# Altium PCB Flight_Controller2.PcbDoc
Units mil, origin at the board's own origin, x right, y up, seen from the top; angles counter-clockwise.
Board outline 1299.21 x 1791.34 mil, 2 copper layers (Top Layer, Bottom Layer), stack 62.8 mil thick; 67 components, 59 nets, 277 pads, 121 vias.
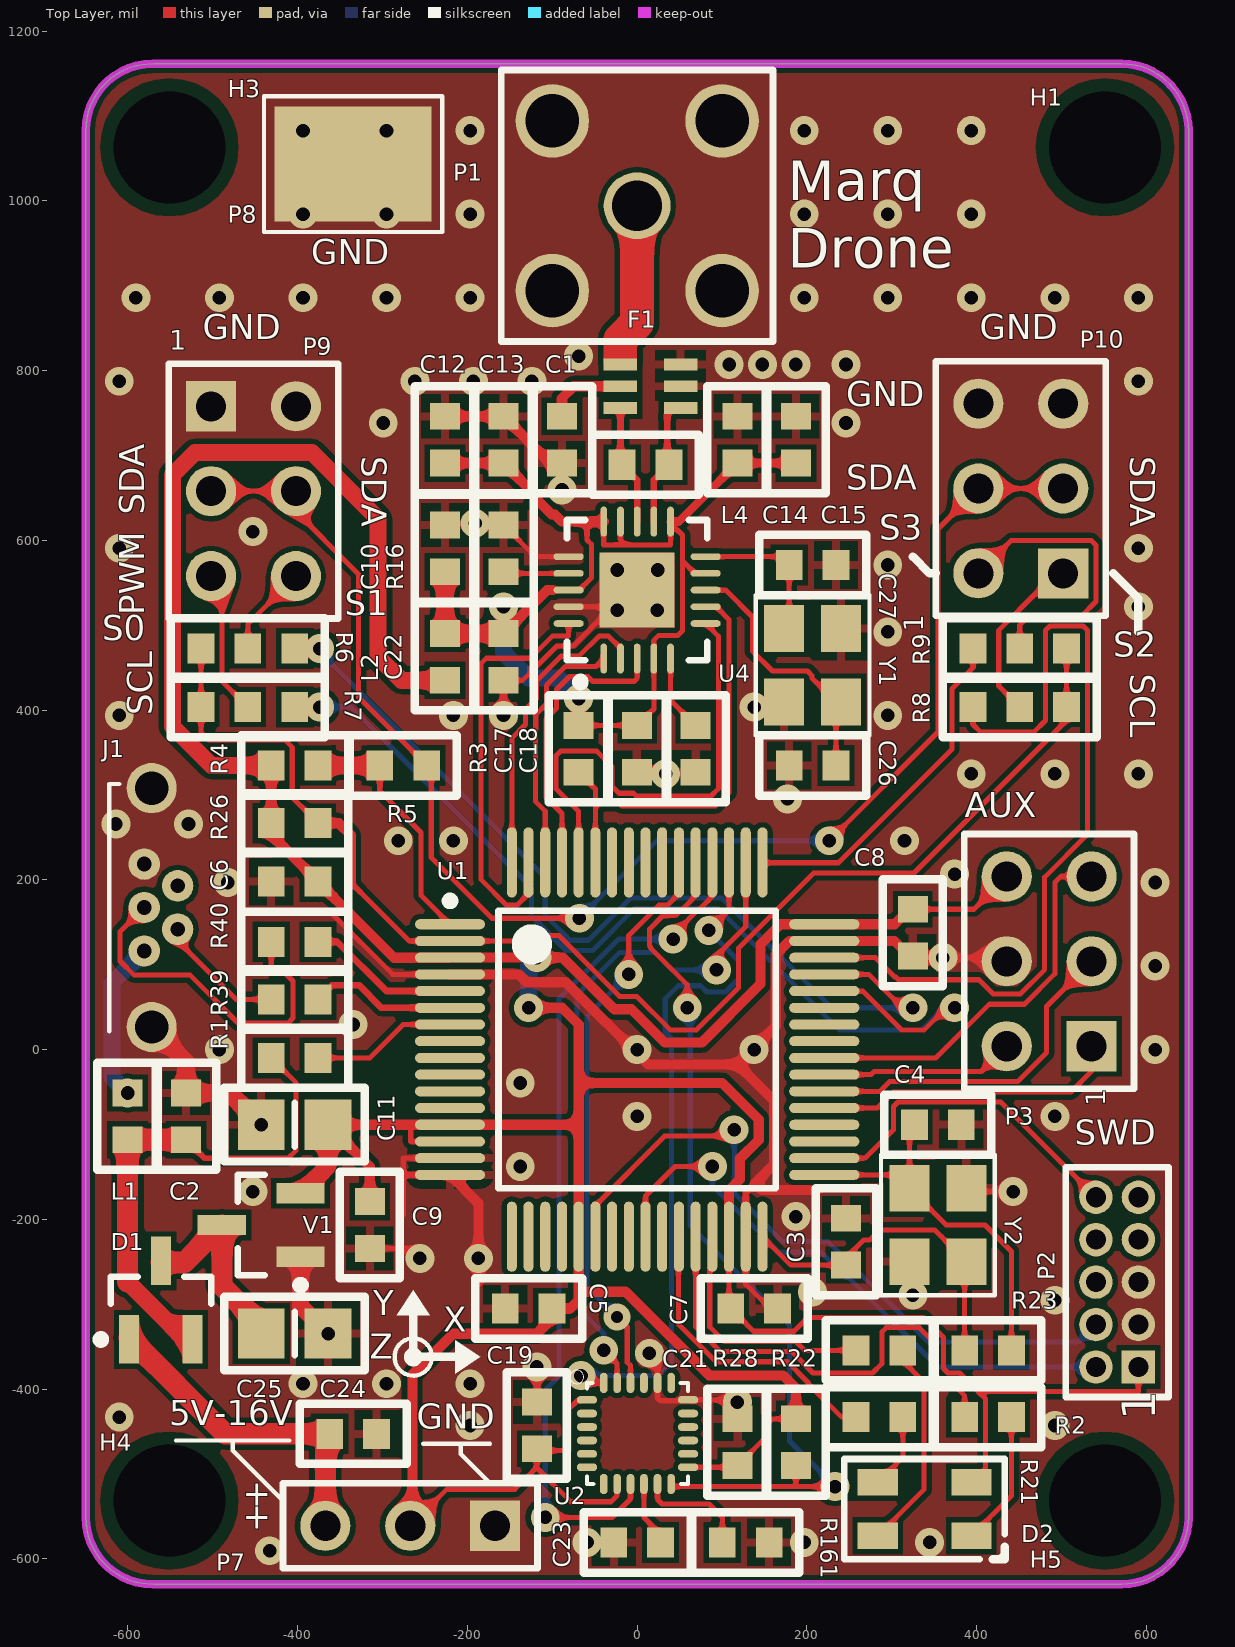
[diagram p0: Top Layer view]
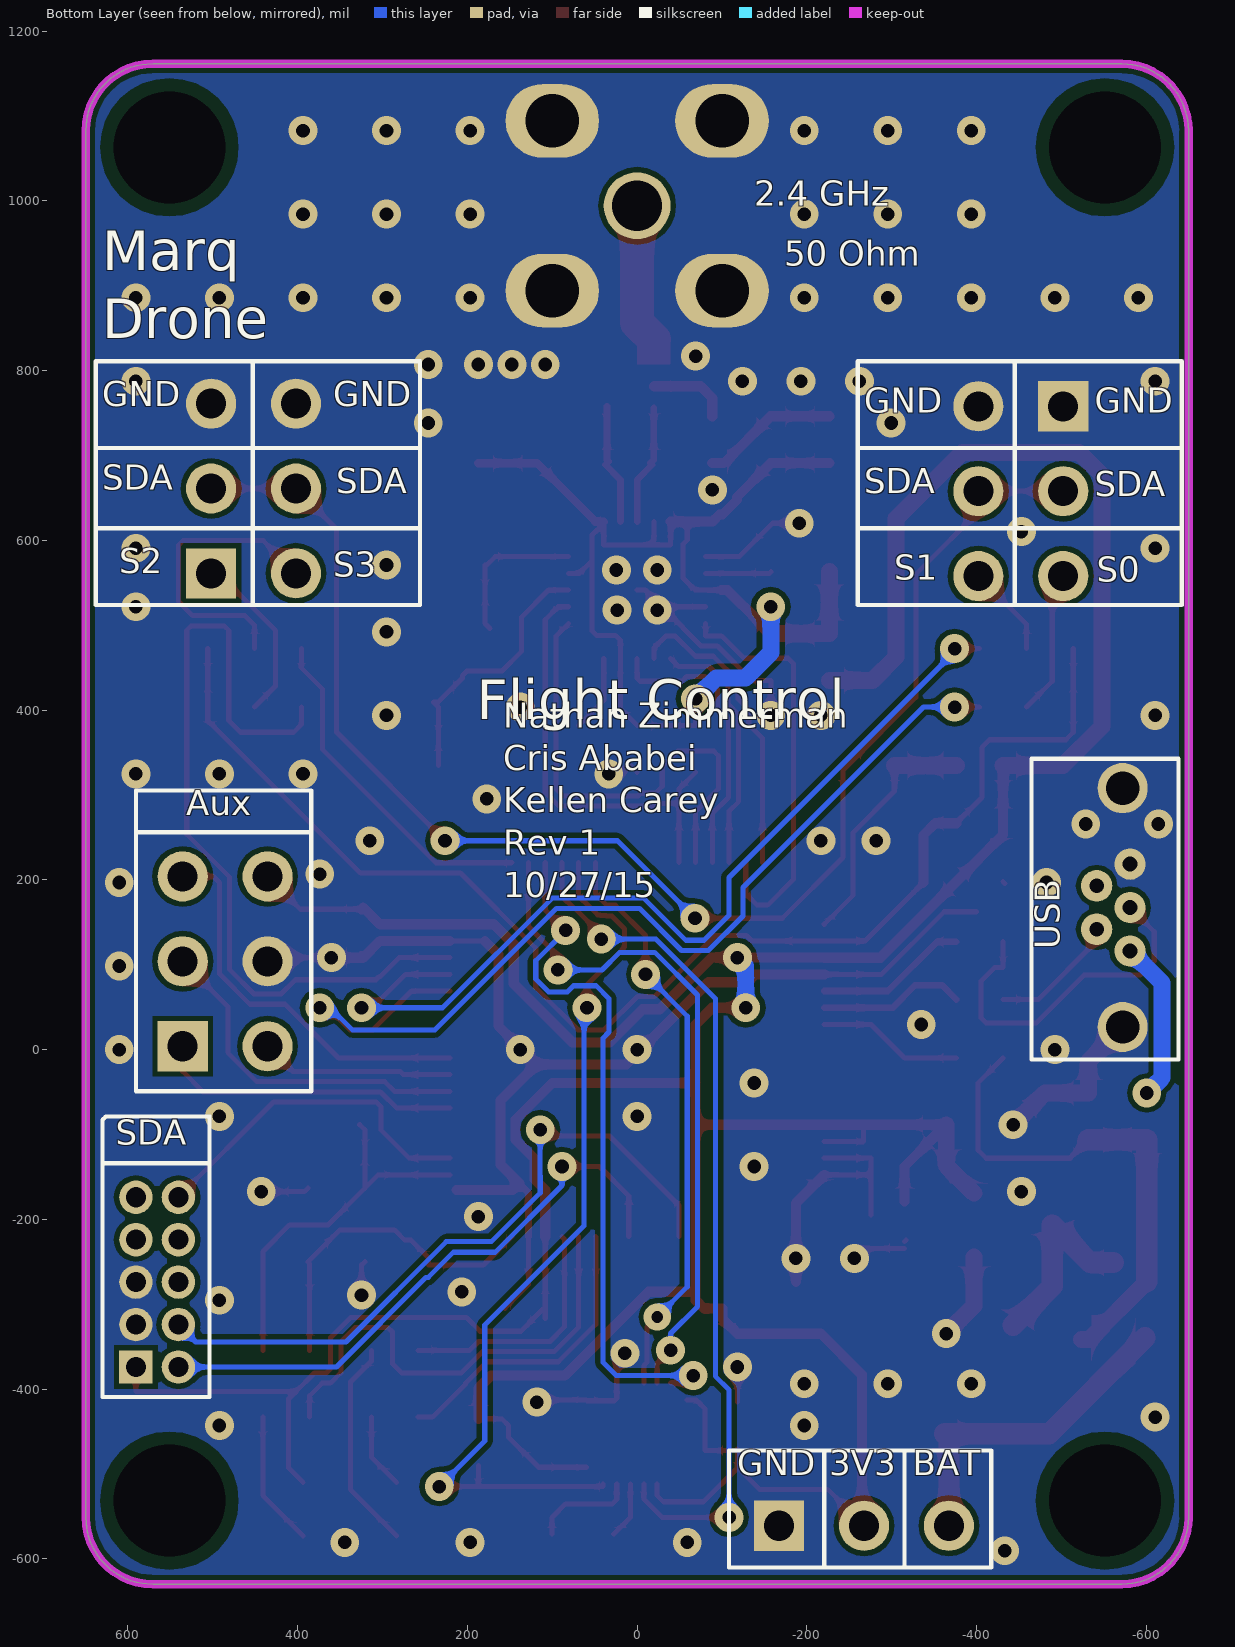
[diagram p1: Bottom Layer view, seen from below]

## Layer stack, top to bottom
Top Solder: solder mask 0.4, Solder Resist, Dk 3.5
Top Layer: signal copper 1.4
Dielectric 1: core 60, FR-4, Dk 4.2
Bottom Layer: signal copper 1.4
Bottom Solder: solder mask 0.4, Solder Resist, Dk 3.5

## Board outline
-649.61,-551.18 -649.61,1082.68 cw(c-570.87,1082.68) -570.87,1161.42 570.87,1161.42 cw(c570.87,1082.68) 649.61,1082.68 649.61,-551.18 cw(c570.87,-551.18) 570.87,-629.92 -570.87,-629.92 cw(c-570.87,-551.18)

## Design rules (kind name [scope] priority, off if disabled: settings)
AssemblyTestPointUsage [All] p1 off:
AssemblyTestpoint [All] p1 off: testpointundercomponent=TRUE minsize=40 maxsize=100 preferedsize=60 minholesize=0 maxholesize=40 preferedholesize=32 testpointgrid=1 usegrid=TRUE gridtolerance=0.01 allowsidetop=TRUE allowsidebottom=TRUE
Clearance Clearance_1 [InComponent('J13') OR InComponent('J16') OR InComponent('J7')] p1: gap=15
Clearance Clearance_3 [InComponent('H1') OR InComponent('H3') OR InComponent('H4') OR InComponent('H5') OR InComponent('H6') OR InComponent('H7') OR InComponent('H8') OR InComponent('H9')] p2: gap=15
Clearance Clearance_2 [(OnLayer('Test Planea')OR OnLayer('Test Plane'))] p3: gap=8.5
Clearance [All] p4: gap=6
ComponentClearance [All] p1 off: gap=10 collisioncheckmode=3 verticalgap=10 showdistances=FALSE
DiffPairsRouting [All] p1: maxlimit=200 minlimit=10 mostfreqgap=10 toplayer_minwidth=6 toplayer_maxwidth=15 toplayer_prefwidth=15 bottomlayer_minwidth=6 bottomlayer_maxwidth=15 bottomlayer_prefwidth=15 maxuncoupledlength=1000
FabricationTestPointUsage [All] p1 off: valid=0 allowmultiple=FALSE
FabricationTestpoint [All] p1 off: side=3 testpointundercomponent=TRUE minsize=40 maxsize=100 preferedsize=60 minholesize=0 maxholesize=40 preferedholesize=32 testpointgrid=1 allowsidetop=TRUE allowsidebottom=TRUE usegrid=TRUE gridtolerance=0.01
HoleSize [All] p1: absolutevalues=TRUE maxlimit=250 minlimit=1 maxpercent=80.000 minpercent=20.000
HoleToHoleClearance [All] p1: gap=12 allowstackedmicrovias=FALSE
MinimumSolderMaskSliver [All] p1: minsoldermaskwidth=6
PasteMaskExpansion [All] p1: expansion=-2
PlaneConnect [All] p1: planeconnectstyle=Direct reliefexpansion=20 reliefentries=4 reliefconductorwidth=20 reliefairgap=10
PolygonConnect PolygonConnect_1 [(HasFootprint('6-0805_MC') OR HasFootprint('1608[0603]C') OR HasFootprint('1608[0603]L') OR HasFootprint('1608[0603]R') OR HasFootprint('1608[0603]LED')OR HasFootprint('Balun')OR HasFootprint('3225_Crystal')OR HasFootprint('LQFP64_10mm_0.5mm'))] p1: connectstyle=Relief reliefconductorwidth=10 reliefentries=4 polygonreliefangle="90 Angle" airgapwidth=10
PolygonConnect [All] p2: connectstyle=Direct reliefconductorwidth=10 reliefentries=4 polygonreliefangle="90 Angle" airgapwidth=10
RoutingVias [All] p1: holewidth=14 width=32 viastyle="Through Hole" minholewidth=14 minwidth=32 maxholewidth=16 maxwidth=34
SMDEntry [All] p1: side=TRUE corner=FALSE anyangle=TRUE
SilkToSilkClearance SilkToSilkClearance_1 [All] p1: silktosilkclearance=0.1
SilkToSolderMaskClearance SilkscreenOverComponentPads [IsPad] p1: minsilkscreentomaskgap=1 clearancetoexposedcopper=TRUE
SolderMaskExpansion SolderMaskExpansion_1 [InComponent('U2')OR InComponent('U27')OR InComponent('J14')] p1: expansion=0
SolderMaskExpansion [All] p2: expansion=5
Width Width_3 [InNet('GND')] p1: maxlimit=80 minlimit=6 preferedwidth=8 minimp=50.000000 maximp=50.000000 favimp=50.000000
Width Width_2 [InNet('3.3V')] p2: maxlimit=40 minlimit=6 preferedwidth=12
Width Width_1 [InNet('5V')] p3: maxlimit=40 minlimit=6 preferedwidth=12
Width [All] p4: maxlimit=80 minlimit=6 preferedwidth=8 minimp=50.000000 maximp=50.000000 favimp=50.000000
17 further rules are at their usual default settings.

## Classes and differential pairs
component class Flight_Controller2: A1 C1 C10 C11 C12 C13 C14 C15 C17 C18 C19 C21 C22 C23 C24 C25 C26 C27 D1 D2 F1 H1 H3 H4 H5 L2 L4 P1 P7 P8 P9 P10 R3 R6 R7 R8 R9 R16 R21 R22 R23 R28 R161 U2 U4 V1 Y1
component class Flight_Controller3: C2 C3 C4 C5 C6 C7 C8 C9 J1 L1 P2 P3 R1 R2 R4 R5 R26 R39 R40 U1 Y2
differential pair USB_MCU1: +USB_MCU1_P -USB_MCU1_N
differential pair USB_MCU: +USB_MCU_P -USB_MCU_N
differential pair RF: +RF_P -RF_N

## Components (designator, comment, footprint, x,y, rotation, side; value= is the part's Value field where it differs from the comment)
C1 "GRM1885C1H220FA01D" 1608[0603]C -88.58,718.5 r270 top
C2 "CL10B104MB8NNNC" 1608[0603]C -531.5,-78.74 r270 top
C3 "CL05C180JB5NNNC" 1608[0603]C 246.06,-226.38 r270 top
C4 "CL05C180JB5NNNC" 1608[0603]C 354.33,-88.58 r180 top
C5 "CL10B104MB8NNNC" 1608[0603]C -127.95,-305.12 r0 top
C6 "CL10B104MB8NNNC" 1608[0603]C -403.54,197.83 r0 top
C7 "CL10B104MB8NNNC" 1608[0603]C 137.8,-305.12 r180 top
C8 "CL10B104MB8NNNC" 1608[0603]C 324.8,137.8 r90 top
C9 "CL10B104MB8NNNC" 1608[0603]C -314.96,-206.69 r90 top
C10 "CL10B104MB8NNNC" 1608[0603]C -226.38,590.55 r270 top
C11 "GRM21BC81C106KE15L" 6-0805_MC -403.54,-88.58 r0 top
C12 "CL10B104MB8NNNC" 1608[0603]C -226.38,718.5 r270 top
C13 "CL10B104MB8NNNC" 1608[0603]C -157.48,718.5 r270 top
C14 "CL10B104MB8NNNC" 1608[0603]C 118.11,718.5 r270 top
C15 "CL10B104MB8NNNC" 1608[0603]C 187.01,718.5 r270 top
C17 "CL10B104MB8NNNC" 1608[0603]C 0,354.33 r90 top
C18 "CL10B104MB8NNNC" 1608[0603]C 68.9,354.33 r90 top
C19 "CL10B103KB8SFNC" 1608[0603]C -118.11,-442.91 r270 top
C21 "CL10B104MB8NNNC" 1608[0603]C 118.11,-462.6 r90 top
C22 "CL10B104MB8NNNC" 1608[0603]C -157.48,462.6 r90 top
C23 "CL10B104MB8NNNC" 1608[0603]C 0,-580.71 r0 top
C24 "CL10B104MB8NNNC" 1608[0603]C -334.65,-452.76 r180 top
C25 "GRM21BC81C106KE15L" 6-0805_MC -403.54,-334.65 r180 top
C26 "CL05C180JB5NNNC" 1608[0603]C 206.69,334.65 r0 top
C27 "CL05C180JB5NNNC" 1608[0603]C 206.69,570.87 r180 top
D1 "BAT54C-7-F" SOT-23B_M_3D -561.02,-295.28 r90 top
D2 "CLV1A-FKB" CLV1A-FKB_RGB_3D 393.7,-561.02 r180 top
F1 "2450BM15B0003E" Balun -19.68,807.09 r90 top
H1 "R30-3001102" M3_Standoff_3 551.18,1062.99 r0 top
H3 "R30-3001102" M3_Standoff_3 -551.18,1062.99 r0 top
H4 "R30-3001102" M3_Standoff_3 -551.18,-531.5 r0 top
H5 "R30-3001102" M3_Standoff_3 551.18,-531.5 r0 top
J1 "614105150721" USB_Micro_Vertical -580.71,167.32 r90 top
L1 "CIM10U800NC" 1608[0603]L -600.39,-78.74 r90 top
L2 "CIM10U800NC" 1608[0603]L -226.38,462.6 r90 top
L4 "LQW18AN10NJ00D" 1608[0603]L 9.84,688.98 r0 top
P1 "SMB" SMA1 0,994.09 r0 top
P2 "GRPB052VWVN-RC" MHDR2X5 590.55,-374.02 r90 top
P3 "68021-406HLF" HDR2X3_3D2 535.43,3.94 r90 top
P7 "M20-9960345" HDR1X3 -167.32,-561.02 r180 top
P8 "5016KCT-ND" GND_CLIP3 -334.65,1043.31 r180 top
P9 "68021-406HLF" HDR2X3_3D2 -501.97,757.87 r270 top
P10 "68021-406HLF" HDR2X3_3D2 501.97,561.02 r90 top
R1 "MCR03EZPFX1003" 1608[0603]R -403.54,-9.84 r0 top
R2 "MCR03ERTF1004" 1608[0603]R 413.39,-354.33 r180 top
R3 "MCR03EZPFX1002" 1608[0603]R -68.9,354.33 r90 top
R4 "MCR03EZPFX1002" 1608[0603]R -403.54,334.65 r180 top
R5 "MCR03EZPFX1003" 1608[0603]R -275.59,334.65 r0 top
R6 "CIM10U800NC" 1608[0603]TRI -431.1,472.44 r180 top
R7 "CIM10U800NC" 1608[0603]TRI -431.1,403.54 r180 top
R8 "CIM10U800NC" 1608[0603]TRI 423.23,403.54 r0 top
R9 "CIM10U800NC" 1608[0603]TRI 423.23,472.44 r0 top
R16 "MCR01MRTF5602" 1608[0603]R -157.48,590.55 r270 top
R21 "MCR03EZPJ271" 1608[0603]R 413.39,-433.07 r180 top
R22 "MCR03EZPJ271" 1608[0603]R 285.43,-354.33 r180 top
R23 "MCR03EZPJ271" 1608[0603]R 285.43,-433.07 r180 top
R26 "MCR03EZPFX1002" 1608[0603]R -403.54,266.73 r180 top
R28 "MCR03EZPFX1002" 1608[0603]R 187.01,-462.6 r90 top
R39 "MCR03ERTF33R0" 1608[0603]R -403.54,59.06 r180 top
R40 "MCR03ERTF33R0" 1608[0603]R -403.54,126.97 r180 top
R161 "MCR03EZPJ000" 1608[0603]R 127.95,-580.71 r0 top
U1 "MK22FN128VLH10" LQFP64_10mm_0.5mm 0,0 r0 top
U2 "MPU-9250" QFN-24/3MM 0,-452.76 r0 top
U4 "CC2500_2_4_ghz" QFN50P400X400-20VM 0,541.34 r90 top
V1 "MCP1702T-5002E/CB" SOT-23B_M_3D -442.91,-206.69 r180 top
Y1 "7M-26.000MEEQ-T" 3225_Crystal 206.69,452.76 r90 top
Y2 "CX3225GB12000P0HPQCC" 3225_Crystal 354.33,-206.7 r90 top

## Footprints (in the part's own frame and the unit in brackets; to place one, negate y for a bottom-side part, rotate by r counter-clockwise, add the part's x,y. Pads: shape width x height; smd on the part's side, far side on the other; paste and mask are expansions set on the pad)
6-0805_MC [mm] "Chip Resistor, Body 2.0x1.2mm, IPC Low Density"
  rect 1.4x1.5 smd: 1(-1,0) 2(1,0)
  silkscreen extent -2.1,-1.1 2.1,1.1, body extent -1,-0.62 1,0.63, height 0.59
1608[0603]C [mm] "Chip Capacitor, Body 1.6x0.8mm, IPC High Density"
  rect 0.8x0.9 smd: 1(-0.7,0) 2(0.7,0)
  silkscreen extent -1.6,-0.9 1.6,0.9, body extent -0.8,-0.4 0.8,0.4, height 0.78
1608[0603]L [mm] "Chip Capacitor, Body 1.6x0.8mm, IPC High Density"
  rect 0.8x0.9 smd: 1(-0.7,0) 2(0.7,0)
  silkscreen extent -1.6,-0.9 1.6,0.9, body extent -0.8,-0.4 0.8,0.4, height 0.8
1608[0603]R [mm] "Chip Capacitor, Body 1.6x0.8mm, IPC High Density"
  rect 0.8x0.9 smd: 1(-0.7,0) 2(0.7,0)
  silkscreen extent -1.6,-0.9 1.6,0.9, body extent -0.8,-0.4 0.8,0.4, height 0.44
1608[0603]TRI [mm] "Chip Capacitor, Body 1.6x0.8mm, IPC High Density"
  rect 0.8x0.9 smd: 1(-0.7,0) 2(0.7,0) 3(2.1,0)
  silkscreen extent -1.6,-0.9 3,0.9, body extent -0.8,-0.4 2.2,0.4, height 0.8
3225_Crystal [mm] "12 MHz Micro Crystal"
  rect 1.4x1.2 smd: 1(-1.1,-0.85) 2(1.1,-0.85) 3(1.1,0.85) 4(-1.1,0.85)
  silkscreen extent -2.1,-1.7 2.1,1.7, body extent -1.6,-1.25 1.6,1.25, height 0.81
Balun [mm]
  rect 0.35x1 smd mask+0.152: 1(0,0) 2(-0.65,0) 3(-1.3,0) 4(-1.3,-1.8) 5(-0.65,-1.8) 6(0,-1.8)
CLV1A-FKB_RGB_3D [mm]
  rect 1.2x0.8 smd: 1(0,0.3) 2(0,-1.3) 3(2.8,-1.3) 4(2.8,0.3)
  silkscreen extent -1,-2 3.8,1, body extent -0.35,-1.91 3.15,0.89, height 1.9
GND_CLIP3 [mil] "Ground clip for a probe"
  rect 185x135 smd: 1(0,0)
  silkscreen extent -105,-80 105,80, body extent -75,-55 75,55, height 91
HDR1X3 [mm] "Connector; Header; 3 Position"
  rect 1.5x1.5 hole 0.9: 1(0,0)
  round 1.5 hole 0.9: 2(2.54,0) 3(5.08,0)
  silkscreen extent -1.27,-1.27 6.35,1.27
HDR2X3_3D2 [mm] "Connector; Header; 3x2 Position"
  rect 1.5x1.5 hole 0.9: 1(0,0)
  round 1.5 hole 0.9: 2(0,2.54) 3(2.54,0) 4(2.54,2.54) 5(5.08,0) 6(5.08,2.54)
  silkscreen extent -1.27,-1.27 6.35,3.81, body extent -1.21,-9.55 6.41,2.9, height 5.8
LQFP64_10mm_0.5mm [mm] "Thin QFP, 64-Leads, Body 10x10mm, Pitch 0.5mm, IPC Low Density"
  oval 2.1x0.3 smd mask+0: 1(-5.6,3.75) 2(-5.6,3.25) 3(-5.6,2.75) 4(-5.6,2.25) 5(-5.6,1.75) 6(-5.6,1.25) 7(-5.6,0.75) 8(-5.6,0.25) 9(-5.6,-0.25) 10(-5.6,-0.75) 11(-5.6,-1.25) 12(-5.6,-1.75) 13(-5.6,-2.25) 14(-5.6,-2.75) 15(-5.6,-3.25) 16(-5.6,-3.75) 33(5.6,-3.75) 34(5.6,-3.25) 35(5.6,-2.75) 36(5.6,-2.25) 37(5.6,-1.75) 38(5.6,-1.25) 39(5.6,-0.75) 40(5.6,-0.25) 41(5.6,0.25) 42(5.6,0.75) 43(5.6,1.25) 44(5.6,1.75) 45(5.6,2.25) 46(5.6,2.75) 47(5.6,3.25) 48(5.6,3.75)
  oval 0.3x2.1 smd mask+0: 17(-3.75,-5.6) 18(-3.25,-5.6) 19(-2.75,-5.6) 20(-2.25,-5.6) 21(-1.75,-5.6) 22(-1.25,-5.6) 23(-0.75,-5.6) 24(-0.25,-5.6) 25(0.25,-5.6) 26(0.75,-5.6) 27(1.25,-5.6) 28(1.75,-5.6) 29(2.25,-5.6) 30(2.75,-5.6) 31(3.25,-5.6) 32(3.75,-5.6) 49(3.75,5.6) 50(3.25,5.6) 51(2.75,5.6) 52(2.25,5.6) 53(1.75,5.6) 54(1.25,5.6) 55(0.75,5.6) 56(0.25,5.6) 57(-0.25,5.6) 58(-0.75,5.6) 59(-1.25,5.6) 60(-1.75,5.6) 61(-2.25,5.6) 62(-2.75,5.6) 63(-3.25,5.6) 64(-3.75,5.6)
  silkscreen extent -5.72,-4.15 4.15,4.57, body extent -6,-6 6,6, height 1.6
M3_Standoff_3 [mil]
  round 0 hole 132 unplated paste+66 mask+66: 1(0,0)
MHDR2X5 [mm] "Connector; Header; 5x2 Position"
  rect 1x1 hole 0.6 mask+0: 1(0,0)
  round 1 hole 0.6 mask+0: 2(0,1.27) 3(1.27,0) 4(1.27,1.27) 5(2.54,0) 6(2.54,1.27) 7(3.81,0) 8(3.81,1.27) 9(5.08,0) 10(5.08,1.27)
  silkscreen extent -0.9,-0.9 5.98,2.17
QFN50P400X400-20VM [mm] "QFN, 20-Leads, Body 4x4mm, Pitch 0.5mm, IPC Low Density"
  oval 0.9x0.2 smd mask+0.051: 1(-2.05,1) 2(-2.05,0.5) 3(-2.05,0) 4(-2.05,-0.5) 5(-2.05,-1) 11(2.05,-1) 12(2.05,-0.5) 13(2.05,0) 14(2.05,0.5) 15(2.05,1)
  oval 0.2x0.9 smd mask+0.051: 6(-1,-2.05) 7(-0.5,-2.05) 8(0,-2.05) 9(0.5,-2.05) 10(1,-2.05) 16(1,2.05) 17(0.5,2.05) 18(0,2.05) 19(-0.5,2.05) 20(-1,2.05)
  rect 2.25x2.25 smd mask+0.051: 21(0,0)
  silkscreen extent -2.87,-2.1 2.1,2.1, body extent -2.07,-2.07 2.07,2.07, height 1
QFN-24/3MM [mil]
  rrect100% 24x9 smd mask+0: 1(-59.06,40) 2(-59.06,24) 3(-59.06,8) 4(-59.06,-7.87) 5(-59.06,-23.62) 6(-59.06,-39.37) 13(60,-39.37) 14(60,-23.62) 15(60,-7.87) 16(60,8) 17(60,24) 18(60,40)
  rrect100% 9x24 smd mask+0: 7(-39.37,-59.06) 8(-23.62,-59.06) 9(-7.87,-59.06) 10(8,-59.06) 11(24,-59.06) 12(40,-59.06) 19(40,60) 20(24,60) 21(8,60) 22(-7.87,60) 23(-23.62,60) 24(-39.37,60)
  silkscreen extent -79,-59 60,75, body extent -59,-59 59,59, height 35
SMA1 [mm]
  round 2 hole 1.5: 1(0,0)
  round 2.2 / inner round 2.2 / far side oval 2.8x2.2 hole 1.6: 2(-2.54,-2.54) 2(-2.54,2.54) 2(2.54,-2.54) 2(2.54,2.54)
  silkscreen extent -4.06,-4.06 4.06,4.06, body extent -3.15,-3.15 3.16,3.16, height 9.55
SOT-23B_M_3D [mm] "SOT23, 3-Leads, Body 2.9x1.3mm, Pitch 0.95mm, Lead Span 2.4mm, IPC Low Density"
  rect 1.45x0.6 smd: 1(-1.175,0.95) 2(-1.175,-0.95) 3(1.175,0)
  silkscreen extent -1.3,-1.5 0.7,1.92, body extent -1.25,-1.46 1.23,1.46, height 0.98
USB_Micro_Vertical [mm] "WR-COM_USB_Micro Type B_Vertical_THT Micro Type B Vertical THT"
  round 0.94 hole 0.44 mask+0: 1(-1.3,0) 2(-0.65,-1) 3(0,0) 4(0.65,-1) 5(1.3,0)
  round 1.5 hole 1 mask+0: Z1(-3.575,-0.22) Z2(3.575,-0.22)
  silkscreen extent -3.7,0.75 3.7,1.05, body extent -3.99,-1.57 4.01,1.33, height 5.62

## Part data
C1 C2 C3 C4 C5 C6 C7 C8 C9 C10 C11 C12 C13 C14 C15 C17 C18 C19 C21 C22 C23 C24 C25 C26 C27: library part "Cap Semi", "Capacitor (Semiconductor SIM Model)"
D1: library part Bat45C, "Bat45C"
D2: library part RGB_LED_SMT, "SMT RGB LED"
F1: library part BALUN_2_4_GHZ, "2450BM15B0003"
H1 H3 H4 H5: library part stand_off, "stand_off"
J1: library part "WR-Communication Connectors 614105150721", "WR-COM_USB_Micro Type B_Vertical_THT"
L1 L2 L4: library part Inductor, "Inductor"
P1: "SMB Straight Connector"
P2: library part "Header 5X2", "Header, 5-Pin, Dual row"
P3 P9 P10: library part "Header 3X2", "Header, 3-Pin, Dual row"
P7: library part "Header 3", "Header, 3-Pin"
P8: library part GND_CLIP, "GND_CLIP"
R1 R2 R3 R4 R5 R16 R21 R22 R23 R26 R28 R39 R40 R161: library part Res1, "Resistor"
R6 R7 R8 R9: library part RPot, "Potentiometer"
U1: "MK22FN128VLH10 MCU"
U2: library part MPU-9250_LIB
V1: library part MCP1700, "MCP1700 3.3V REG"
Y1 Y2: library part 12MHz_Crystal, "12MHz Micro Crystal"

## Via types
v1: diameter 34, hole 16, Top Layer to Bottom Layer, tented both sides, 120 vias
v2: diameter 32, hole 14, Top Layer to Bottom Layer, tented both sides, 1 vias

## Nets (pads, with @x,y where several pads share a name; then routed paths per layer and width w, separated by ;. In a path a pad name is that pad's centre, name@x,y a point inside that pad or via, vN(x,y) a via of type N, cw(c..) or ccw(c..) an arc to the next point about the centre after c; other vN are vias at no path point)
3.3V: C5.2 C6.2 C7.2 C8.2 C9.2 C11.2 C19.2 C21.1 D2.2 L2.1 P2.1 P3.6 P7.2 R4.2 R26.2 R28.2 U1.3 U1.13 U1.14 U1.21 U1.30 U1.48 U2.1 U2.8 U2.13 V1.2 | length 5693.3
  Top Layer w6: P7.2 -264.81,-558.51 -224.43,-518.13 -144.11,-518.13 -118.11,-492.13 ; -266.73,-89.57 -266.73,-108.27 U1.14 ; U2.1 -69.65,-412.76 -80.06,-423.16 -80.06,-472.44 -116.14,-472.44 C19.2 -118.11,-492.13 ; U2.8 -23.62,-525.59 -30.84,-532.81 -78.17,-532.81 -118.11,-492.87 -118.11,-492.13 ; U2.13 116.14,-492.13 C21.1 151.57,-456.69 151.57,-442.91 159.45,-435.04 R28.2 ; C7.2@108.27,-316.93 U1.30 ; C7.2 136.95,-331.83 184.83,-331.83 201.05,-315.61 337.44,-315.61 361.08,-339.25 361.08,-375.78 366.35,-381.05 380,-381.05 401.65,-402.7 ; C8.2 396.85,165.36 P3.6 ; D2.2 410.57,-492.97 410.57,-411.63 401.65,-402.7 ; P2.1 590.55,-402.7 401.65,-402.7
  Top Layer w12: R4.2 R26.2 -431.1,252.95 C6.2 -286.42,108.27 U1.3 -220.38,108.36 v1@-109.95,108.36 ; C9.2 -314.96,-137.8 C11.2 U1.13 -68.9,-88.58 ; P7.2@-264.81,-558.51 -264.81,-383.11 -216.54,-334.83 -118.3,-334.83 -100.39,-316.93 C5.2 -78.74,-305.12 -68.9,-295.28 -68.9,-285.43 ; v1(-127.95,49.21) -88.58,49.21 -68.9,29.53 -68.9,-39.37 ; v1(-118.11,108.27) -110.05,108.27 v1@-109.95,108.36 ; U1.30 108.27,-165.51 120.92,-152.85 120.92,-128.75 143.17,-106.5 143.17,-82.48 100.07,-39.37 -68.9,-39.37 ; R28.2 187.01,-398.99 171.88,-383.86 84.87,-383.86 -13.55,-285.43 -68.9,-285.43 ; C8.2 322.84,167.32 303.15,147.64 U1.48 168.85,147.64 145.38,124.17 145.38,77.56 76.04,8.21 32.8,8.21 -6.57,47.58 -26.83,47.58 -87.6,108.36 v1@-109.95,108.36 ; -68.9,-285.43 U1.21 -68.9,-88.58 ; -68.9,-88.58 -68.9,-39.37
  Top Layer w20: R4.2 -501.52,334.65 -547.5,380.63 -547.5,676.73 -520.83,703.4 -383.11,703.4 -305.12,625.41 -305.12,462.6 -277.56,435.04 L2.1 ; V1.2 -364.17,-136.81 C11.2
  Bottom Layer w20: v1(-127.95,49.21) -127.95,98.43 v1(-118.11,108.27)
3V3CC: C10.2 C12.2 C13.2 C14.2 C15.2 C17.2 C22.2 L2.2 R3.2 U4.4 U4.9 U4.11 U4.14 U4.15 U4.18 | length 1515.7
  Top Layer w6: C22.2 v1(-157.48,521.65) ; -125.99,521.65 -124.02,523.62 -122.05,521.65 ; -99.41,541.34 U4.18 -68.32,541.34 -53.99,555.67 -53.99,595.33 -59.06,600.39 -59.06,622.05 ; v1(-68.9,413.39) R3.2 C17.2 19.69,401.58 U4.4 19.69,482.28 25.45,488.05 48.02,488.05 53.29,493.32 53.29,576.05 ; U4.15 -39.37,594.63 -13.92,594.63 ; U4.14 -19.68,600.39 -13.92,594.63 ; U4.11 U4.11@39.37,620.08 ; U4.9 68.32,561.02 53.29,576.05 ; -13.92,594.63 39.37,594.63 U4.11@39.37,620.08 ; U4.11@39.37,620.08 53.29,606.16 53.29,576.05
  Top Layer w10: U4.11 49.21,622.05 C14.2 C15.2
  Top Layer w12: C12.2 C13.2 -117.58,651.05 -117.58,647.44 -100.59,630.45 -96.99,630.45 -88.58,622.05 -59.06,622.05 U4.15 ; C22.2 -125.99,521.65 ; -124.02,523.62 -106.3,541.34 -99.41,541.34
  Top Layer w20: C10.2 L2.2 C22.2
  Bottom Layer w20: -157.48,472.44 -157.48,467.52 ; v1(-157.48,521.65) -157.48,467.52 ; v1(-68.9,413.39) -93.5,437.99 -127.95,437.99 -157.48,467.52
5V: C2.2 D1.2 L1.1 R1.1 | length 604.8
  Top Layer w6: C2.2 -509.69,-128.11 -411.21,-128.11 -401.73,-118.63 -401.73,-39.21 R1.1
  Top Layer w20: -600.39,-273.62 -532.48,-341.54 D1.2
  Top Layer w25: -600.39,-273.62 L1.1 C2.2
12MHZ_XIN: C3.2 R2.2 U1.32 Y2.1 | length 397.1
  Top Layer w6: U1.32 181.1,-253.94 C3.2 246.06,-245.08 266.57,-224.57 273.78,-224.57 285.9,-212.44 350.24,-212.44 Y2.1 385.83,-251.97 R2.2
12MHZ_XOUT: C4.2 R2.1 U1.33 Y2.3 | length 451.6
  Top Layer w6: U1.33 305.12,-147.64 Y2.3 ; C4.2 320.87,-94.48 Y2.3 ; R2.1 440.94,-237.83 409.81,-206.69 364.17,-206.69 Y2.3
A1: P3.3 U1.38 | length 410.3
  Top Layer w6: U1.38 286.01,-49.21 297.35,-37.87 448.12,-37.87 482.28,-3.7 482.28,50.79 P3.3
A2: P3.1 U1.37 | length 362.4
  Top Layer w6: U1.37 283.29,-68.9 302.32,-49.87 351.22,-49.87 357.44,-49.87 511.16,-49.87 535.43,-25.59 P3.1
B_LED: R23.2 U1.27 | length 358.6
  Top Layer w6: U1.27 48.64,-221.04 48.64,-323.66 92.82,-367.83 177.07,-367.83 202.01,-392.78 202.01,-393.92 241.16,-433.07 R23.2
G_LED: R22.2 U1.29 | length 291.3
  Top Layer w6: U1.29 85.49,-223.57 85.49,-326.56 102.76,-343.83 187.01,-343.83 197.5,-354.33 R22.2
GDO0: U1.60 U4.6 | length 570.2
  Top Layer w6: U1.60 -68.9,280.58 -95.61,307.3 -95.61,346.25 -90.34,351.52 -47.45,351.52 -29.53,333.59 -29.53,310.11 -21.44,302.02 -4.15,302.02 -0.93,298.8 87.12,298.8 95.61,307.3 95.61,487.06 U4.6
GDO2: U1.61 U4.3 | length 345.2
  Top Layer w6: U1.61 -88.58,278.02 -107.61,297.05 -107.61,372.86 -107.48,372.99 -107.48,389.5 -94.9,402.08 -94.9,424.16 -79.67,439.39 -58.13,439.39 -52.66,433.91 -3.13,433.91 0,437.04 U4.3
GND: C1.2 C2.1 C3.1 C4.1 C5.1 C6.1 C7.1 C8.1 C9.1 C10.1 C11.1 C12.1 C13.1 C14.1 C15.1 C17.1 C18.1 C19.1 C21.2 C22.1 C23.1 C24.1 C25.1 C26.1 C27.1 F1.5 F1.6 J1.5 J1.Z1 J1.Z2 P1.2 P2.3 P2.5 P3.4 P7.1 P8.1 P9.1 P9.2 P10.5 P10.6 R16.1 R161.2 U1.4 U1.15 U1.16 U1.31 U1.47 U2.18 U2.20 U4.16 U4.19 U4.21 V1.1 Y1.2 Y1.4 Y2.2 Y2.4 | length 3048.9
  Top Layer w6: C6.1@-433.07,195.87 C6.1 ; -399.61,162.4 -361.76,162.4 -287.94,88.58 U1.4 ; C9.1@-316.93,-224.41 C9.1@-314.96,-226.38 ; C9.1 -257.87,-234.25 -255.91,-236.22 v1(-255.91,-246.06) ; -275.59,-194.88 -275.59,-147.64 ; U1.16 -275.59,-147.64 ; U1.15 -275.59,-127.95 -275.59,-147.64 ; v1(-190.94,620.08) -159.45,620.08 R16.1 -120.08,580.71 U4.16 ; v1(-157.48,393.7) C22.1 -134.92,435.04 -94.58,475.39 -75.22,475.39 -53.99,496.61 -53.99,497.19 U4.21@-29.53,521.65 ; C19.1 v1(-118.11,-374.02) ; U4.19 U4.21@-29.53,521.65 ; C17.1 7.87,334.65 17.72,324.8 v1(33.46,324.8) ; U4.21 -9.84,541.34 U4.21@-29.53,521.65 ; v1(14.38,-357.76) 24,-367.38 U2.20 24,-411.07 26.69,-413.76 59,-413.76 U2.18 115.51,-412.76 v1(118.11,-415.35) ; U1.31 127.95,-276.64 155.51,-304.2 C7.1@155.51,-305.12 ; U1.47@179.4,127.95 U1.47 ; Y2.4 324.8,-253.94 v1(324.8,-289.37) ; v1(360.24,108.27) 431.1,108.27 P3.4 ; Y2.2 391.73,-167.32 v1(442.91,-167.32)
  Top Layer w8: U1.31 127.95,-168.45 138.92,-157.48
  Top Layer w12: C12.1 C13.1 -102.36,690.94 C1.2 ; U1.16 -187.01,-181.1 v1(-187.01,-246.06) -187.01,-273.62 ; U1.4 -139.44,88.58 -130.12,79.27 -83.97,79.27 12.77,-17.47 118.27,-17.47 ; U1.47@179.4,127.95 163.38,111.94 163.38,27.65 118.27,-17.47 ; 212.79,-165.54 146.98,-165.54 138.92,-157.48 161.17,-135.23 161.17,-60.38 118.27,-17.47 ; U1.47 303.15,127.95 322.83,108.27 C8.1 326.77,108.27 v1(360.24,108.27)
  Top Layer w20: J1.Z1 -531.5,-13.98 C2.1 -480.31,-51.18 v1(-442.91,-88.58) ; V1.1 -396.65,-302.17 v1(-364.17,-334.65)
  other v1: -433.07,-590.55 -59.06,-580.71 196.85,-580.71 344.49,-580.71 -196.85,-442.91 492.13,-442.91 -610.24,-433.07 -393.7,-393.7 -295.28,-393.7 -196.85,-393.7 492.13,-295.28 206.69,-285.43 187.01,-196.85 -452.76,-167.32 -137.8,-137.8 0,-78.74 492.13,-78.74 -137.8,-39.37 -492.13,0 0,0 137.8,0 610.24,0 -334.65,29.53 610.24,98.43 -482.28,196.85 610.24,196.85 374.02,206.69 -281.5,246.06 -216.54,246.06 314.96,246.06 -614.17,265.75 -528.55,265.75 177.17,295.28 393.7,324.8 492.13,324.8 590.55,324.8 -610.24,393.7 -216.54,393.7 295.28,393.7 137.8,403.54 295.28,492.13 -23.62,517.72 23.62,517.72 590.55,521.65 -23.62,564.96 24.38,564.96 295.28,570.87 -610.24,590.55 590.55,590.55 -452.76,610.24 -88.58,659.45 -299.21,738.19 246.06,738.19 -610.24,787.4 -261.81,787.4 -192.91,787.4 -124.02,787.4 590.55,787.4 108.27,807.09 147.64,807.09 187.01,807.09 246.06,807.09 -68.9,816.93 -590.55,885.83 -492.13,885.83 -393.7,885.83 -295.28,885.83 -196.85,885.83 196.85,885.83 295.28,885.83 393.7,885.83 492.13,885.83 590.55,885.83 -393.7,984.25 -295.28,984.25 -196.85,984.25 196.85,984.25 295.28,984.25 393.7,984.25 -393.7,1082.68 -295.28,1082.68 -196.85,1082.68 196.85,1082.68 295.28,1082.68 393.7,1082.68
K22F_SWD_CLK: P2.4 U1.22 | length 819.4
  Top Layer w6: U1.22 -49.21,-183.65 32.48,-101.95 106.71,-101.95 v1(114.17,-94.49)
  Bottom Layer w6: v1(114.17,-94.49) 114.17,-116.77 114.58,-117.18 114.58,-148.56 114.17,-148.97 114.17,-168.7 171.85,-226.38 225.04,-226.38 343.15,-344.49 520.08,-344.49 P2.4
MISO1: U1.64 U4.2 | length 365.1
  Top Layer w6: U1.64 -147.64,366.77 -131.48,382.93 -131.48,400.59 -118.9,413.18 -118.9,434.1 -89.61,463.39 -68.69,463.39 -44.73,487.35 -34.01,487.35 -19.68,473.02 U4.2
MISO2: U1.52 U2.9 | length 1023.3
  Top Layer w6: v1(-108.27,-551.18) -29.53,-551.18 -7.87,-529.53 U2.9 ; v1(42.36,130.06) 43.24,130.06 45.35,127.95 45.35,138.21 73.54,166.39 74.51,166.39 88.58,180.47 U1.52
  Bottom Layer w6: v1(-108.27,-551.18) -108.27,-400.94 -92.11,-384.79 -92.11,60.05 -22.11,130.06 v1(42.36,130.06)
MOSI1: U1.63 U4.20 | length 496.9
  Top Layer w6: U1.63 -127.95,183.64 -141.47,170.13 -153.81,170.13 -184.2,200.52 -184.2,454.52 -177.67,461.04 -125.9,461.04 -99.49,487.44 -80.71,487.44 U4.20
MOSI2: U1.51 U2.24 | length 838.7
  Top Layer w6: v1(-66.11,-384.16) -57.51,-392.76 U2.24 ; v1(84.3,140.39) 108.27,164.36 U1.51
  Bottom Layer w6: v1(-66.11,-384.16) 24.75,-384.16 40.38,-368.53 40.38,13.37 33.06,20.69 33.06,59.98 48.29,75.21 74.87,75.21 82.22,67.86 104.21,67.86 119.44,83.09 119.44,104.63 84.3,139.77 v1(84.3,140.39)
MPU_INT: R28.1 U1.53 U2.12 | length 1079.4
  Top Layer w6: U2.12 40,-514.9 183.91,-514.9 ; v1(59.06,49.21) 59.06,76.32 17.7,117.68 17.7,117.95 16.36,119.29 16.36,119.69 15.2,120.85 15.2,122.03 14.71,122.52 14.71,142.03 29.94,157.26 36.22,157.26 36.87,157.91 43.08,157.91 43.88,158.71 46.56,158.71 68.9,181.04 U1.53 ; R28.1 187.01,-511.81 183.91,-514.9 ; v1(233.13,-514.9) 183.91,-514.9
  Bottom Layer w6: v1(59.06,49.21) 62.58,45.69 62.58,-207.62 179.54,-324.58 179.54,-461.32 v1(233.13,-514.9)
NCS1: R3.1 U1.59 U4.7 | length 517.3
  Top Layer w6: R3.1 -49.21,307.09 -49.21,290.02 ; U1.59 -49.21,290.02 ; U4.7 93.1,521.65 108.27,506.48 108.27,302.98 92.09,286.8 -17.78,286.8 -21,290.02 -49.21,290.02
NCS2: U1.54 U2.22 | length 685
  Top Layer w6: v2(-23.62,-314.96) -11.62,-326.96 -11.62,-368.53 -7.87,-372.27 U2.22 ; v1(-9.84,88.58) -9.84,134.45 25.84,170.13 35.7,170.13 49.21,183.64 U1.54
  Bottom Layer w6: v2(-23.62,-314.96) -59.06,-279.53 -59.06,39.37 v1(-9.84,88.58)
NetC1_1: C1.1 F1.2 | length 96.3
  Top Layer w12: C1.1 -88.58,767.72 -74.8,781.5 F1.2
NetC18_2: C18.2 U4.5 | length 91
  Top Layer w6: U4.5 39.37,411.42 C18.2
NetC23_2: C23.2 U2.10 | length 67.2
  Top Layer w6: U2.10 8,-551.31 C23.2@27.56,-570.87
NetC26_2: C26.2 U4.8 Y1.1 | length 316.6
  Top Layer w6: U4.8 104.3,541.34 136.04,509.6 136.04,469.35 159.37,446.01 200.58,446.01 205.85,440.74 205.85,437.85 234.25,409.45 Y1.1 234.25,403.54 C26.2
NetC27_2: C27.2 U4.10 Y1.3 | length 179.8
  Top Layer w6: U4.10 167.32,580.71 177.17,570.87 C27.2 179.13,501.97 Y1.3
NetD2_1: D2.1 R21.1 | length 159.3
  Top Layer w6: D2.1 440.94,-525.59 R21.1
NetD2_3: D2.3 R23.1 | length 89
  Top Layer w6: D2.3 312.99,-480.31 R23.1
NetD2_4: D2.4 R22.1 | length 251.2
  Top Layer w6: D2.4 337.74,-518.56 337.74,-391.65 312.99,-366.9 R22.1
NetF1_1: F1.1 P1.1 | length 165.6
  Top Layer w40: -19.68,836.61 0,856.3 P1.1
NetJ1_1: J1.1 L1.2 | length 198.4
  Top Layer w20: L1.2@-600.39,-47.26 v1(-600.4,-51.17) L1.2@-600.4,-47.25
  Bottom Layer w20: v1(-600.4,-51.17) -618.57,-33 -618.57,78.28 J1.1
NetP9_5: P9.5 R7.2 | length 172.3
  Top Layer w6: P9.5 -489.03,544.94 -489.03,433.91 R7.2
NetP9_6: P9.6 R6.2 | length 108.9
  Top Layer w6: R6.2 -458.66,501.18 P9.6
NetP10_1: P10.1 R8.2 | length 196.2
  Top Layer w6: R8.2 426.04,428.29 426.04,493.89 473.49,541.34 P10.1@501.97,541.34
NetP10_2: P10.2 R9.2 | length 352
  Top Layer w6: P10.2 440.5,599.55 535.22,599.55 540.5,594.28 540.5,527.77 523.89,511.16 461.94,511.16 450.79,500 R9.2
NetR16_2: R16.2 U4.17 | length 77.6
  Top Layer w6: R16.2 -155.51,561.02 U4.17
NetR161_1: R161.1 U2.11 | length 123.1
  Top Layer w6: U2.11 24,-530.12 29.31,-535.43 84.65,-535.43 100.39,-551.18 R161.1@100.39,-570.87
PWM_CH0: R7.1 U1.44 | length 1189.8
  Top Layer w6: R7.1 v1(-374.02,403.54) ; U1.44 265.75,68.9 311.43,23.21 338.17,23.21 364.17,49.21 v1(374.02,49.21)
  Bottom Layer w6: v1(-374.02,403.54) -337.25,403.54 -124.61,190.9 -124.61,157.48 -83.87,116.74 -52.39,116.74 -2.74,166.39 95.07,166.39 238.26,23.21 335.57,23.21 361.57,49.21 v1(374.02,49.21)
PWM_CH1: R6.1 U1.45 | length 1093.9
  Top Layer w6: R6.1 v1(-374.02,472.44) ; U1.45 272.88,88.58 312.25,49.21 v1(324.8,49.21)
  Bottom Layer w6: v1(-374.02,472.44) -374.02,468.5 -108.28,202.77 -108.28,158.12 -78.9,128.74 -57.36,128.74 -7.71,178.39 100.04,178.39 229.23,49.21 v1(324.8,49.21)
PWM_CH2: R8.1 U1.46 | length 985.7
  Top Layer w6: U1.46 280.58,108.27 298.09,90.76 303.36,85.49 304.68,85.49 307.91,82.27 402.62,82.27 419.47,65.41 451.39,65.41 480.13,94.14 480.13,203.12 530.65,253.64 530.65,493.89 525.38,499.16 486.43,499.16 481.16,493.89 481.16,387.72 467.26,373.83 404.72,373.83 395.67,382.87 R8.1
PWM_CH3: R9.1 U1.49 | length 407.7
  Top Layer w6: U1.49 148.04,220.06 237.15,220.06 370.92,353.84 370.92,424.99 395.67,449.74 R9.1
R_LED: R21.2 U1.28 | length 569.7
  Top Layer w6: U1.28 68.9,-326.94 97.79,-355.83 182.04,-355.83 207.25,-381.05 277.35,-381.05 288.24,-370.15 288.24,-332.89 293.52,-327.61 332.47,-327.61 349.08,-344.22 349.08,-380.75 361.38,-393.05 371.08,-393.05 385.83,-407.8 R21.2
RF_N: F1.3 L4.1 U4.13 | length 140.9
  Top Layer w7.99: F1.3 -19.68,694.88 L4.1@-15.75,690.94 ; L4.1 0,671.26 U4.13
RF_P: F1.4 L4.2 U4.12 | length 140
  Top Layer w7.99: U4.12 19.69,671.26 L4.2 ; L4.2@33.47,692.91 35.43,694.88 F1.4@35.43,757.87
RST_TGTMCU: P2.10 U1.34 | length 409.9
  Top Layer w6: U1.34 268.5,-127.95 302.02,-94.43 302.02,-67.14 307.29,-61.87 346.25,-61.87 362.41,-61.87 428.4,-61.87 P2.10
RX1: P3.2 U1.39 | length 228.8
  Top Layer w6: U1.39 275.59,-29.53 279.25,-25.87 405.63,-25.87 P3.2
SCL: R6.3 R7.3 R8.3 R9.3 R26.1 U1.2 | length 1599.1
  Top Layer w6: R6.3 R7.3 -513.78,373.78 -505,365 -415.26,365 -406.35,356.09 -406.35,297.1 R26.1 ; -337.4,196.85 -268.5,127.95 U1.2 -135.2,127.95 -128.88,134.27 -92.3,134.27 -20.61,62.58 -0.36,62.58 39.01,23.21 69.82,23.21 119.44,72.83 119.44,119.44 208.06,208.06 326.17,208.06 505.91,387.8 R8.3 R9.3
  Top Layer w12: R26.1 -351.38,266.73 -337.4,252.75 -337.4,196.85
SCLK1: U1.62 U4.1 | length 299.2
  Top Layer w6: U1.62 -108.27,280.74 -119.61,292.08 -119.61,377.83 -119.48,377.96 -119.48,394.47 -106.9,407.05 -106.9,429.13 -84.64,451.39 -48.61,451.39 U4.1
SCLK2: U1.50 U2.23 | length 811.4
  Top Layer w6: v1(-39.37,-354.33) -23.62,-370.08 U2.23 ; v1(93.44,93.86) 93.44,110.41 127.95,144.92 U1.50
  Bottom Layer w6: v1(-39.37,-354.33) -39.37,-334.57 -71.06,-302.88 -71.06,64.14 -20.61,114.58 20.61,114.58 41.34,93.86 v1(93.44,93.86)
SDA: P9.3 P9.4 P10.3 P10.4 R5.2 | length 1741.6
  Top Layer w6: P9.3 P9.4 -392.13,657.87 -409.11,640.89 -328.33,560.11 -328.33,414.95 R5.2 -242.54,329.15 -242.54,226.21 -171.07,154.74 v1(-68.13,154.74) ; v1(226.38,246.06) 354.33,374.02 354.33,613.39 P10.4 P10.3
  Bottom Layer w6: v1(-68.13,154.74) 23.19,246.06 v1(226.38,246.06)
SDAP: R4.1 R5.1 U1.1 | length 294.1
  Top Layer w6: R5.1 -303.15,304.48 -254.54,255.87 -254.54,181.7 U1.1
  Top Layer w20: R4.1 R5.1
SWD_DIO_TGTMCU: P2.2 U1.25 | length 712.7
  Top Layer w6: U1.25 9.84,-172.45 44.49,-137.8 v1(88.58,-137.8) ; P2.2@540.55,-382.75 P2.2
  Bottom Layer w6: v1(88.58,-137.8) 88.58,-160.08 167.32,-238.82 216.54,-238.82 246.06,-268.35 248.66,-268.35 354.33,-374.02 P2.2
TX1: P3.5 U1.40 | length 466.6
  Top Layer w6: U1.40 351.73,-9.84 414.98,53.41 456.36,53.41 492.13,89.17 492.13,196.85 499.21,203.94 P3.5
USB_MCU1_N: J1.2 R39.2 | length 152.6
  Top Layer w6: J1.2 -541.34,127.95 -472.44,59.06 R39.2
USB_MCU1_P: J1.3 R40.2 | length 417.7
  Top Layer w6: J1.3 -609.21,138.82 -609.21,104.34 -592.52,87.64 -526.61,87.64 -470.31,31.34 -411.21,31.34 -405.35,37.2 -405.35,80.91 -420.9,96.46 -431.1,96.46 R40.2
USB_MCU_N: R39.1 U1.6 | length 173.5
  Top Layer w7.99: R39.1 -359.18,75.86 -327.68,75.86 -301.03,49.21 U1.6
USB_MCU_P: R40.1 U1.5 | length 179.6
  Top Layer w7.99: R40.1 -353.35,126.97 -295.27,68.9 U1.5
USB_PWR: R1.2 U1.7 | length 171.8
  Top Layer w6: R1.2 -314.96,-9.84 -275.59,29.53 U1.7
VBAT: C24.2 D1.1 P7.3 | length 393.5
  Top Layer w25: D1.1@-598.43,-339.57 -485.24,-452.76 C24.2 -367.32,-457.87 P7.3
VP1: C25.2 D1.3 V1.3 | length 227.5
  Top Layer w25: D1.3@-561.02,-250.98 -533.46,-250.98 V1.3 -489.17,-278.54 C25.2@-442.91,-324.8
pads on no net: H1.1 H3.1 H4.1 H5.1 J1.4 P2.6 P2.7 P2.8 P2.9 U1.8 U1.9 U1.10 U1.11 U1.12 U1.17 U1.18 U1.19 U1.20 U1.23 U1.24 U1.26 U1.35 U1.36 U1.41 U1.42 U1.43 U1.55 U1.56 U1.57 U1.58 U2.2 U2.3 U2.4 U2.5 U2.6 U2.7 U2.14 U2.15 U2.16 U2.17 U2.19 U2.21

## Polygon pours and split planes (outlines as drawn)
GND on Top Layer "Top Layer-No Net 1" (solid, remove dead copper, pour order 0): -895.67,1309.06 -885.83,1299.21 846.46,1299.21 846.46,-944.88 836.61,-954.72 826.77,-944.88 -866.14,-944.88
GND on Bottom Layer "Top Layer-No Net 1" (solid, remove dead copper, pour order 2): -885.83,1250 797.24,1250 826.77,1279.53 807.09,1259.84 807.09,-836.61 -905.51,-836.61

## Keep-outs
Keep-Out Layer:
  the board outline again, w10

## Other copper
Top Layer:
  rectangle net NetF1_1: -39.37,807.09 0,836.61

## Silkscreen, mask and mechanical layers (free items; w line width, h text height)
Top Overlay:
  circle w5: c-263.78,-362.2 r22.01
  circle w20: c-263.78,-362.2 r1
  region: -263.78,-283.46 -283.46,-312.99 -244.09,-312.99
  region: -185.04,-362.2 -214.57,-342.52 -214.57,-381.89
  lines w5: -543.31,-460.63 -409.45,-460.63 ; -476.38,-460.63 -476.38,-472.44 -417.32,-531.5 ; -251.97,-464.57 -173.23,-464.57 ; -207.87,-465.35 -207.87,-476.38 -173.23,-511.02
  lines w10: -263.78,-312.99 -263.78,-362.2 -214.57,-362.2 ; 324.8,580.71 344.49,561.02 351.97,561.02 ; 561.02,561.02 590.55,531.5 590.55,492.13
  text "GND" at -383.86,915.35 h50
  text "Marq / Drone" at 177.17,905.51 h80
  text "GND" at -511.81,826.77 h50
  text "GND" at 403.54,826.77 h50
  text "GND" at 246.06,748.03 h50
  text "SDA" at -334.65,698.82 h50 r270
  text "SDA" at 570.87,698.82 h50 r270
  text "SDA" at 246.06,649.61 h50
  text "SDA" at -570.87,629.92 h50 r90
  text "S3" at 285.43,590.55 h50
  text "PWM" at -570.87,511.81 h50 r90
  text "S1" at -344.49,501.97 h50
  text "S0" at -629.92,472.44 h50
  text "S2" at 561.02,452.76 h50
  text "SCL" at 570.87,442.91 h50 r270
  text "SCL" at -561.02,393.7 h50 r90
  text "AUX" at 385.83,263.78 h50
  text "SWD" at 515.75,-122.05 h50
  text "Y" at -311.02,-322.83 h50
  text "X" at -228.35,-342.52 h50
  text "Z" at -314.96,-374.02 h50
  text "5V-16V" at -551.18,-452.76 h50
  text "GND" at -259.84,-456.69 h50
  text "+" at -464.57,-547.24 h50
  text "+" at -464.57,-574.8 h50
Bottom Overlay:
  lines w5: -641.73,614.17 -444.88,614.17 -259.84,614.17 ; -641.73,708.66 -444.88,708.66 -259.84,708.66 ; -314.96,-610.24 -314.96,-472.44 ; -220.47,-610.24 -220.47,-472.44 ; 255.91,614.17 452.76,614.17 637.8,614.17 ; 255.91,708.66 452.76,708.66 637.8,708.66 ; 503.94,-133.86 629.92,-133.86 ; -444.88,523.62 -259.84,523.62 -259.84,811.02 -444.88,811.02 ; -444.88,523.62 -641.73,523.62 -641.73,811.02 -444.88,811.02 ; -444.88,523.62 -444.88,811.02 ; -220.47,-472.44 -108.27,-472.44 -108.27,-610.24 -216.54,-610.24 -226.38,-610.24 -417.32,-610.24 -417.32,-476.38 -417.32,-472.44 -220.47,-472.44 ; 383.86,255.91 383.86,-49.21 590.55,-49.21 590.55,255.91 ; 383.86,255.91 590.55,255.91 ; 383.86,255.91 383.86,305.12 590.55,305.12 590.55,255.91 ; 452.76,523.62 452.76,811.02 ; 452.76,523.62 255.91,523.62 255.91,811.02 452.76,811.02 ; 452.76,523.62 637.8,523.62 637.8,811.02 452.76,811.02 ; -637.8,-11.81 -464.57,-11.81 -464.57,0 -464.57,342.52 -496.06,342.52 -633.86,342.52 -637.8,342.52 -637.8,-11.81 ; 503.94,-409.45 629.92,-409.45 629.92,-82.68 625.98,-78.74 503.94,-78.74 503.94,-409.45
  text "2.4 GHz" at -137.8,984.25 h50
  text "50 Ohm" at -173.23,913.39 h50
  text "Marq / Drone" at 629.92,822.83 h80
  text "GND" at 358.27,748.03 h50
  text "GND" at 629.92,748.03 h50
  text "GND" at -539.37,740.16 h50
  text "GND" at -267.72,740.16 h50
  text "SDA" at 629.92,649.61 h50
  text "SDA" at -267.72,645.67 h50
  text "SDA" at 354.33,645.67 h50
  text "SDA" at -539.37,641.73 h50
  text "S2" at 610.24,551.18 h50
  text "S3" at 358.27,547.24 h50
  text "S1" at -303.15,543.31 h50
  text "S0" at -541.34,541.34 h50
  text "Flight Control" at 188.98,374.02 h80
  text "Aux" at 531.5,265.75 h50
  text "Nathan Zimmerman / Cris Ababei / Kellen Carey / Rev 1 / 10/27/15" at 157.48,169.29 h50
  text "USB" at -507.87,118.11 h50 r270
  text "SDA" at 614.17,-122.05 h50
  text "BAT" at -324.8,-511.81 h50
  text "3V3" at -226.38,-511.81 h50
  text "GND" at -118.11,-511.81 h50

## Dimensions
551.18,1062.99 to 551.18,-531.5 on Mechanical 1
551.18,-531.5 to -551.18,-531.5 on Mechanical 1
649.61,-551.18 to -649.61,-551.18 on Mechanical 1
-570.87,1161.42 to -570.87,-629.92 on Mechanical 1

## Text inside footprints (layer, text, board x,y; h text height)
P2: Top Overlay "1" at 610.55,-437.01 h39.37 r90
P3: Top Overlay "1" at 559.06,-66.93 h40 r90
P9: Top Overlay "1" at -551.18,816.93 h40
P10: Top Overlay "1" at 344.49,492.13 h40 r90